# Altium PCB Plocica_kalibrator.PcbDoc (part 2 of 2)
Units mil, origin at the board's own origin, x right, y up, seen from the top; angles counter-clockwise.
Board outline 6889.76 x 4133.86 mil, 2 copper layers (Top Layer, Bottom Layer); 126 components, 118 nets, 449 pads, 105 vias.
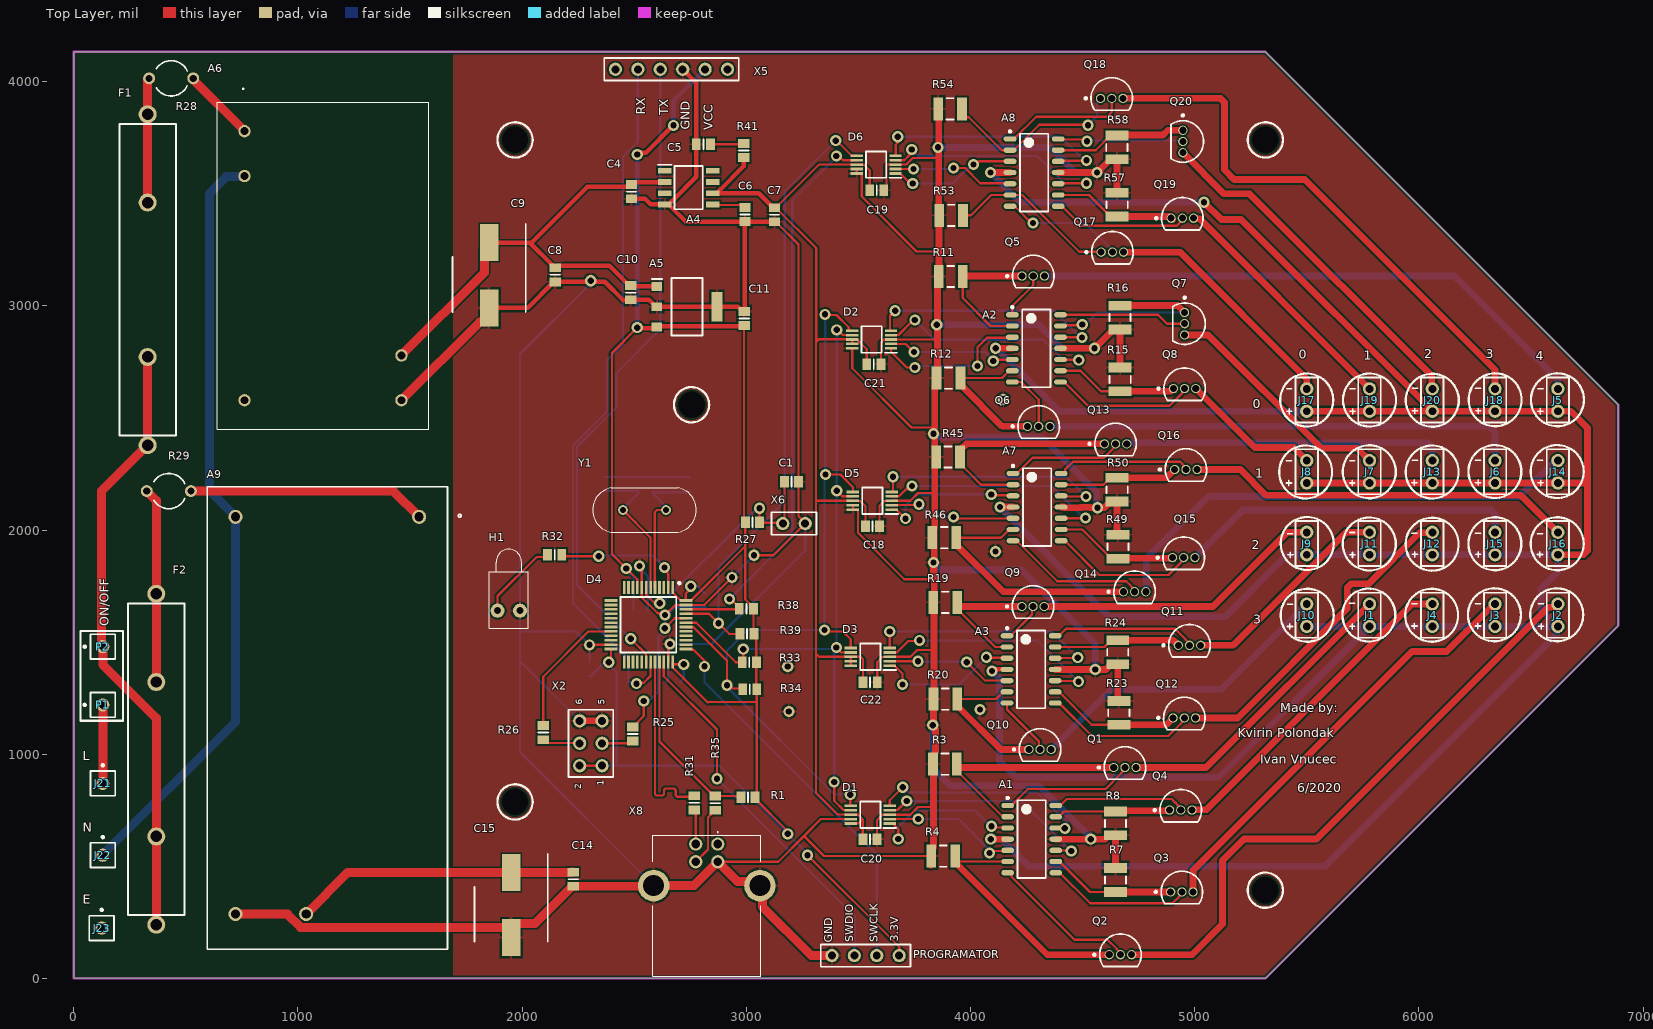
[diagram p0: Top Layer view]

## Silkscreen, mask and mechanical layers (free items; w line width, h text height) (continued)
Top Overlay: (continued)
  circle w10: c6057,1620 r118.11
  circle w10: c6059,1937 r118.11
  circle w10: c6059,2259 r118.11
  circle w10: c6618,2581 r118.11
  circle w10: c6615,1622 r118.11
  circle w10: c6617,1939 r118.11
  circle w10: c6617,2261 r118.11
  circle w10: c6340,2581 r118.11
  circle w10: c6337,1622 r118.11
  circle w10: c6339,1939 r118.11
  circle w10: c6339,2261 r118.11
  circle w10: c5779,2260 r118.11
  circle w10: c5779,1938 r118.11
  circle w10: c5777,1621 r118.11
  circle w10: c5502,1620 r118.11
  circle w10: c5502,1940 r118.11
  circle w10: c5780,2580 r118.11
  circle w10: c5495,2259 r118.11
  circle w10: c5500,2580 r118.11
  lines w7: 5408,2210 5432,2210 ; 5408,2310 5432,2310 ; 5410,2530 5434,2530 ; 5410,2630 5434,2630 ; 5413,1570 5437,1570 ; 5413,1670 5437,1670 ; 5413,1983 5437,1983 ; 5415,1890 5439,1890 ; 5420,2197 5420,2222 ; 5422,2517 5422,2542 ; 5425,1557 5425,1582 ; 5427,1877 5427,1902 ; 5690,1673 5714,1673 ; 5691,1571 5715,1571 ; 5691,1989 5715,1989 ; 5691,2210 5715,2210 ; 5691,2310 5715,2310 ; 5692,1890 5716,1890 ; 5693,2530 5717,2530 ; 5693,2630 5717,2630 ; 5703,1558 5703,1583 ; 5703,2197 5703,2222 ; 5704,1877 5704,1902 ; 5705,2517 5705,2542 ; 5968,1572 5992,1572 ; 5968,1672 5992,1672 ; 5968,1985 5992,1985 ; 5968,2212 5992,2212 ; 5970,1892 5994,1892 ; 5970,2532 5994,2532 ; 5971,2311 5995,2311 ; 5971,2632 5995,2632 ; 5980,1559 5980,1584 ; 5980,2199 5980,2224 ; 5982,1879 5982,1904 ; 5982,2519 5982,2544 ; 6251,1572 6275,1572 ; 6251,1672 6275,1672 ; 6251,1985 6275,1985 ; 6251,2312 6275,2312 ; 6251,2632 6275,2632 ; 6252,2212 6276,2212 ; 6253,1892 6277,1892 ; 6253,2532 6277,2532 ; 6263,1559 6263,1584 ; 6264,2199 6264,2224 ; 6265,1879 6265,1904 ; 6265,2519 6265,2544 ; 6528,1891 6552,1891 ; 6528,2310.5 6552,2310.5 ; 6529,1984 6553,1984 ; 6530,2530.5 6554,2530.5 ; 6530,2630.5 6554,2630.5 ; 6531,2211 6555,2211 ; 6533,1570.5 6557,1570.5 ; 6533,1670.5 6557,1670.5 ; 6540,1878 6540,1903 ; 6542,2517.5 6542,2542.5 ; 6543,2198 6543,2223 ; 6545,1557.5 6545,1582.5
  lines w10: 30,1150 30,1550 50,1550 220,1550 220,1150 30,1150
  text "RX" at 2562,3852 h70 r90
  text "TX" at 2666,3850 h70 r90
  text "GND" at 2761.22,3786 h70 r90
  text "VCC" at 2864.22,3783.06 h70 r90
  text "3" at 6298,2753.78 h70
  text "2" at 6023.94,2753 h70
  text "0" at 5465,2750.78 h70
  text "1" at 5754,2747 h70
  text "4" at 6521,2744 h70
  text "0" at 5258,2530.78 h70
  text "1" at 5270,2219 h70
  text "2" at 5253.94,1900 h70
  text "ON/OFF" at 169.22,1570 h70 r90
  text "3" at 5261,1569.78 h70
  text "Made by:" at 5382,1174.15 h70
  text "Kvirin Polondak" at 5193,1062.71 h70
  text "L" at 40,960 h70
  text "Ivan Vnucec" at 5293,944.71 h70
  text "6/2020" at 5457,817.78 h70
  text "N" at 40,640 h70
  text "E" at 40,320 h70
  text "3.3V" at 3692.33,164 h60 r90
  text "SWDIO" at 3491.33,162 h60 r90
  text "SWCLK" at 3599.33,161 h60 r90
  text "GND" at 3397.33,160 h60 r90
Drill Drawing:
  text ".Legend" at 7188,667.99 h60

## Text inside footprints (layer, text, board x,y; h text height)
X2: Top Overlay "1" at 2375,860 h50 r90; Top Overlay "2" at 2275,845 h50 r90; Top Overlay "5" at 2380,1220 h50 r90; Top Overlay "6" at 2280,1220 h50 r90